# Altium PCB ch559.PcbDoc
Units mil, origin at the board's own origin, x right, y up, seen from the top; angles counter-clockwise.
Board outline 2020 x 2465 mil, 2 copper layers (Top Layer, Bottom Layer); 72 components, 55 nets, 247 pads, 84 vias.
Unrouted connection lines stored in the file: 59.
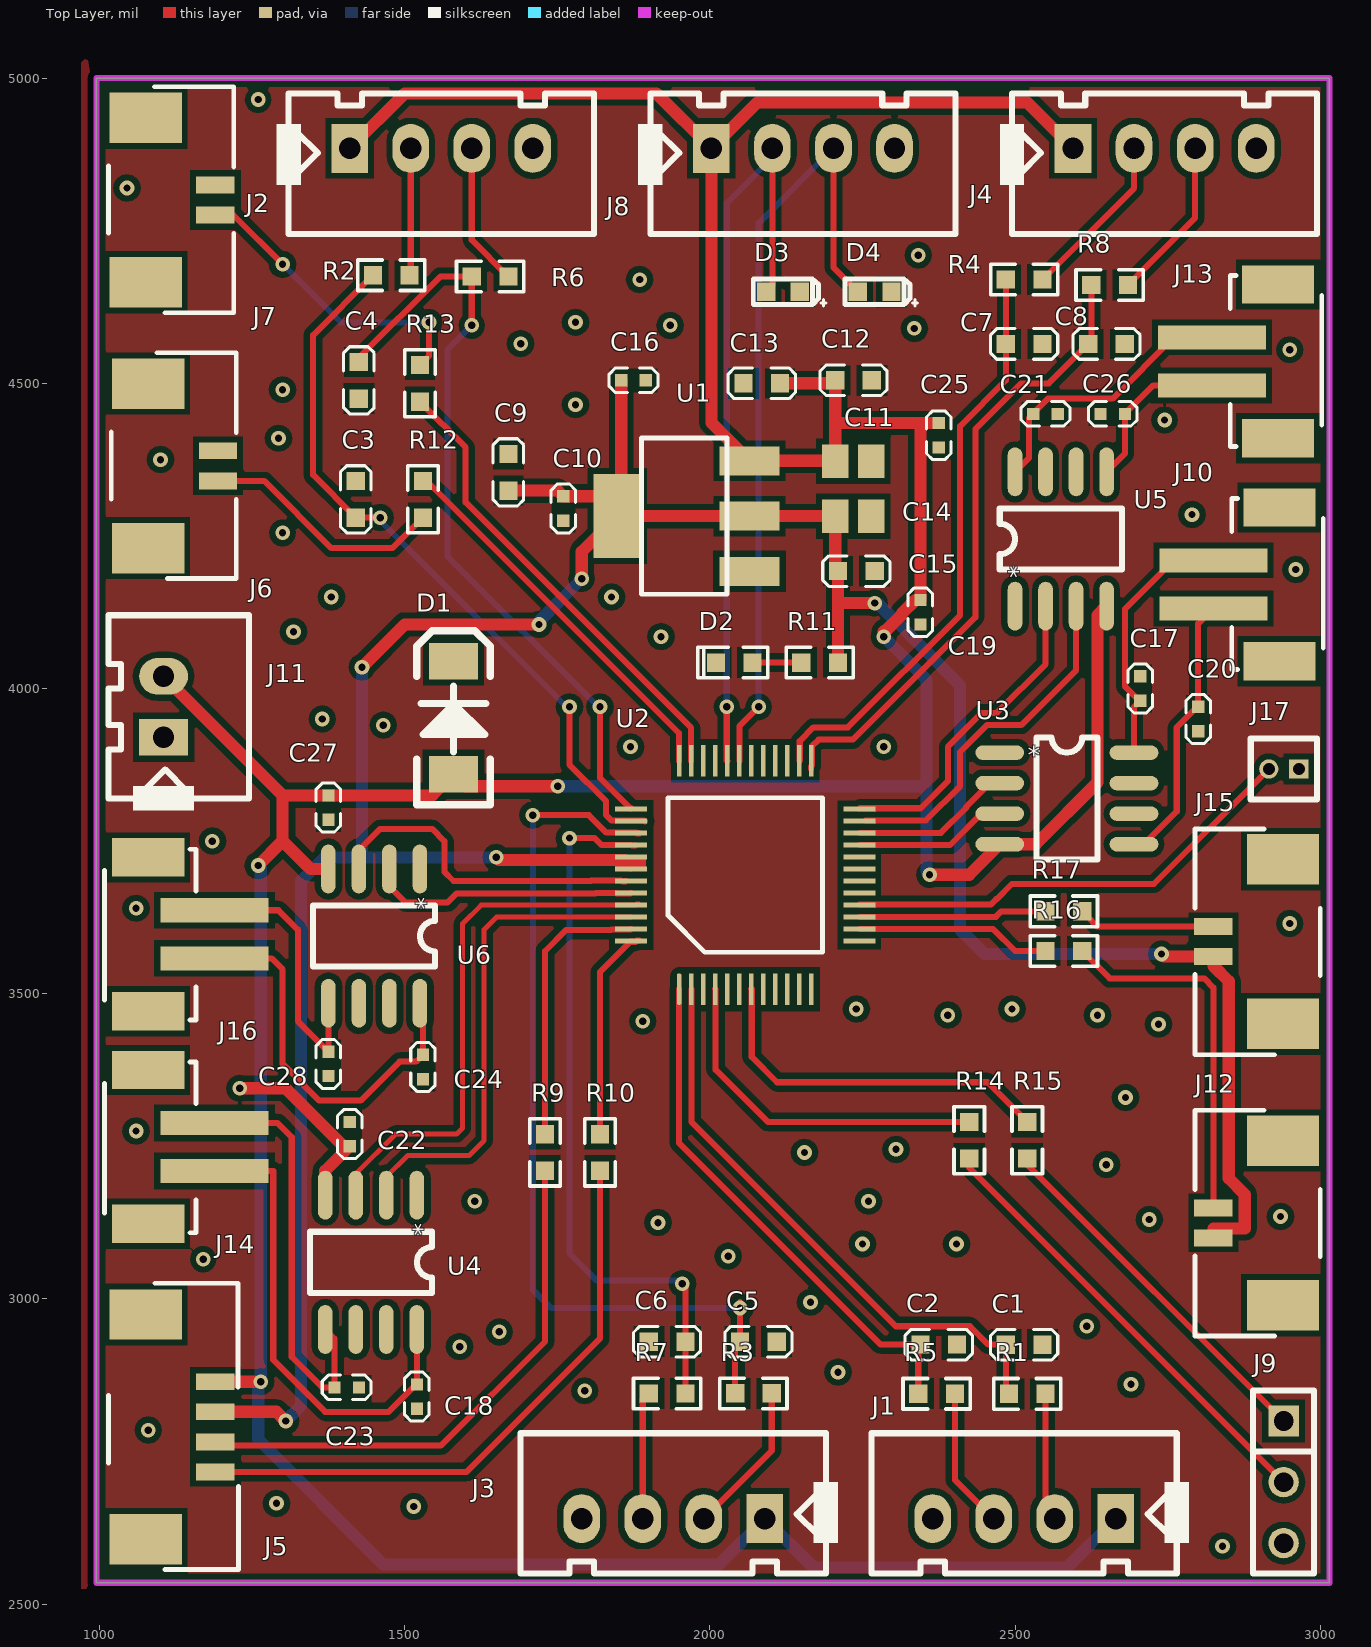
[diagram p0: Top Layer view]
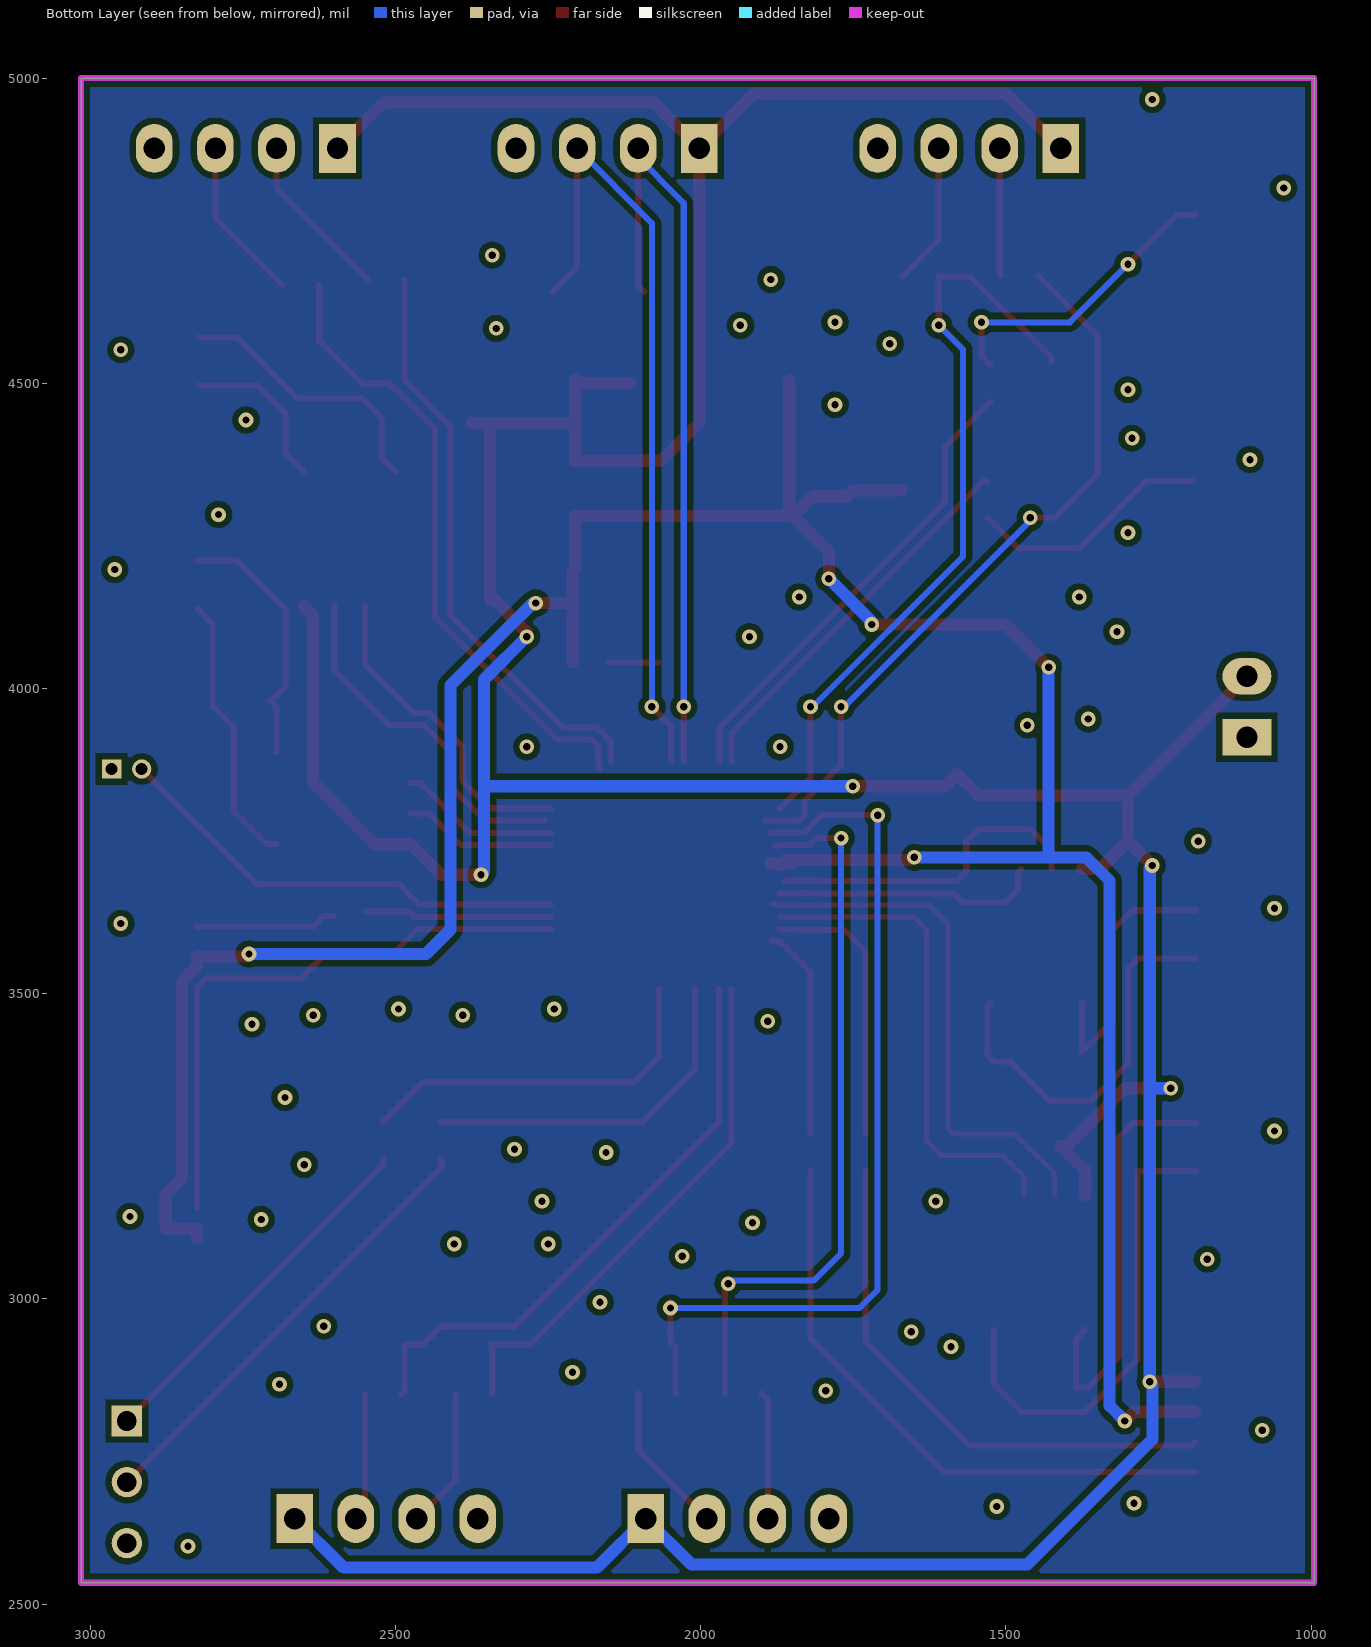
[diagram p1: Bottom Layer view, seen from below]
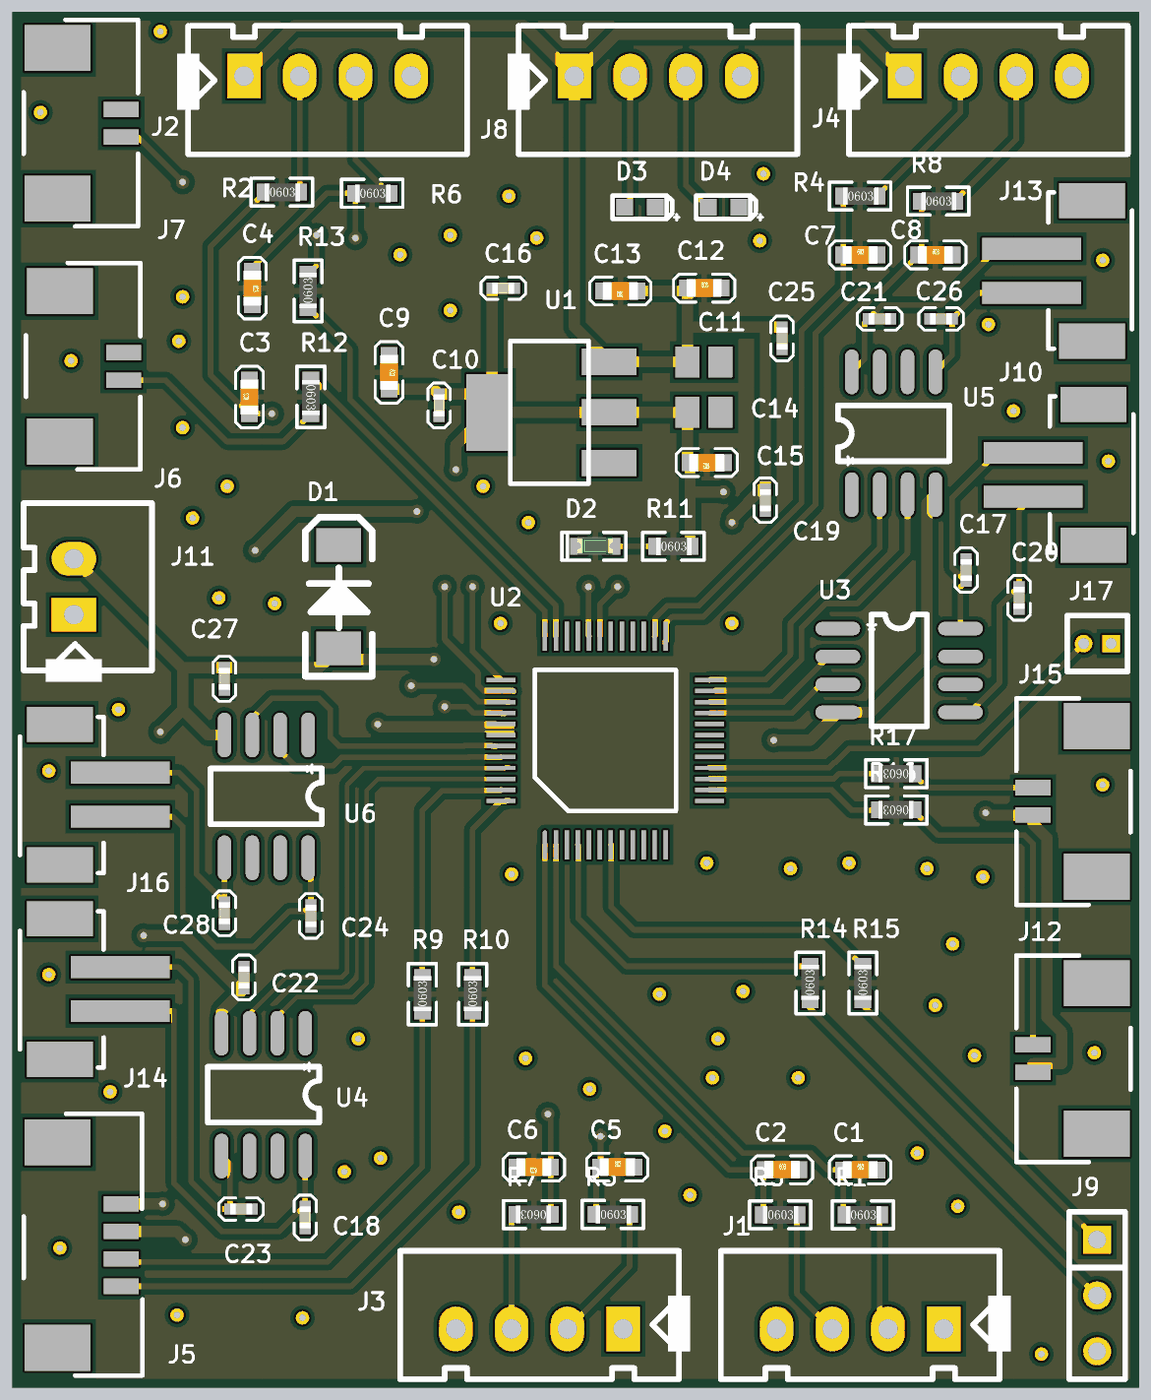
[diagram p2: 3D render of the assembled board from above, using the file's embedded part models]

## Layer stack, top to bottom
Top Solder: solder mask 0.4, Solder Resist, Dk 3.5
Top Layer: signal copper 1.4
Dielectric 1: dielectric 12.6, FR-4, Dk 4.8
Bottom Layer: signal copper 1.4
Bottom Solder: solder mask 0.4, Solder Resist, Dk 3.5

## Board outline
995,2535 995,5000 3015,5000 3015,2535

## Design rules (kind name [scope] priority, off if disabled: settings)
Clearance [All] p1: gap=10 ignorepadtopadclearanceinfootprint=FALSE except(0: Arc-Hole Track-Hole SMDPad-Hole THPad-Hole Via-Hole Fill-Hole Poly-Hole Region-Hole Text-Hole)
PolygonConnect PolygonConnect_1 [IsVia] p1: connectstyle=Direct reliefconductorwidth=10 reliefentries=4 polygonreliefangle="90 Angle" airgapwidth=10
PolygonConnect [All] p2: connectstyle=Relief reliefconductorwidth=10 reliefentries=4 polygonreliefangle="90 Angle" airgapwidth=10
RoutingVias [All] p1: holewidth=28 width=50 viastyle="Through Hole" minholewidth=28 minwidth=50 maxholewidth=28 maxwidth=50
SolderMaskExpansion [All] p1: expansion=4
Width Width_1 [InNetClass('IN')] p1: maxlimit=10 minlimit=8 preferedwidth=8
Width POW [InNetClass('pow')] p2: maxlimit=40 minlimit=10 preferedwidth=20
Width [All] p3: maxlimit=10 minlimit=8 preferedwidth=10
30 further rules are at their usual default settings.

## Classes and differential pairs
net class IN: INA1 INA2 INA3 INA4 INB1 INB2 INB3 INB4
net class pow: 3.3V_VCC 5V_VCC

## Components (designator, comment, footprint, x,y, rotation, side; value= is the part's Value field where it differs from the comment)
C1 "102K10V" C0603 2485,2925 r0 top
C2 "102K10V" C0603 2345,2925.25 r0 top
C3 "102K10V" C0603 1420,4280 r90 top
C4 "102K10V" C0603 1425,4535 r270 top
C5 "102K10V" C0603 2049.5,2930 r0 top
C6 "102K10V" C0603 1960,2930 r180 top
C7 "102K10V" C0603 2485,4564.5 r0 top
C8 "102K10V" C0603 2620,4564.5 r0 top
C9 "106K50V" C0603 1670,4384.21 r270 top
C10 "104J10V" C0402 1760,4275 r90 top
C11 "226M50V" C0805 2235,4372.5 r0 top
C12 "106K50V" C0603 2205.47,4505 r0 top
C13 "105K16V" C0603 2115,4500 r180 top
C14 "226M50V" C0805 2235,4282.5 r0 top
C15 "105K16V" C0603 2270,4192.5 r180 top
C16 "104J10V" C0402 1855,4505 r0 top
C17 "104J10V" C0402 2705,4020 r270 top
C18 "104J10V" C0402 1520,2820 r90 top
C19 "104J10V" C0402 2345,4145 r270 top
C20 "104J10V" C0402 2800,3970 r270 top
C21 "104J10V" C0402 2570,4450 r180 top
C22 "104J10V" C0402 1410,3250 r90 top
C23 "104J10V" C0402 1385,2855 r0 top
C24 "104J10V" C0402 1530,3360 r90 top
C25 "104J10V" C0402 2375,4435 r270 top
C26 "104J10V" C0402 2680,4450 r180 top
C27 "104J10V" C0402 1375,3825 r270 top
C28 "104J10V" C0402 1375,3405 r270 top
D1 "SMAJ5.0CA" DO-214 1580,3859.65 r90 top
D2 "LED0603G" D-LED0603G 2070,4042.5 r180 top
D3 "ESDA_TR1/0603" HS_0603D 2120,4650 r180 top
D4 "ESDA_TR1/0603" HS_0603D 2270,4650 r180 top
J1 "SH1.0-T-1-LT-4A_卧式" XH2.54-4P 2665,2640 r180 top
J2 "SH1.0-T-1-LT-4A_卧式" XH2.54-4P 1410,4885 r0 top
J3 "SH1.0-T-1-LT-4A_卧式" XH2.54-4P 2090,2640 r180 top
J4 "SH1.0-T-1-LT-4A_卧式" XH2.54-4P 2595,4885 r0 top
J5 "Header 4" "J-SH1.27 -4" 1190,2716.57 r90 top
J6 "XH1.27-2P" J-SH1.27-2 1194.17,4340.24 r90 top
J7 "XH1.27-2P" J-SH1.27-2 1190,4775.79 r90 top
J8 "Header 4" XH2.54-4P 2002.5,4885 r0 top
J9 "S2.54-3P" S2.54-3P 2940,2800 r270 top
J10 "SH1.0-T-1-LT-2A_卧式" J-SH2.0-T-1-LT-2A_立式 2825,4131.26 r90 top
J11 "XH1.25-2P" XH2.54-2p 1105,3920 r90 top
J12 "XH1.27-2P" J-SH1.27-2 2825,3149.21 r270 top
J13 "SH1.0-T-1-LT-2A_卧式" J-SH2.0-T-1-LT-2A_立式 2822.52,4496.61 r90 top
J14 "SH1.0-T-1-LT-2A_卧式" J-SH2.0-T-1-LT-2A_立式 1188.27,3288.39 r270 top
J15 "XH1.27-2P" J-SH1.27-2 2825,3610 r270 top
J16 "SH1.0-T-1-LT-2A_卧式" J-SH2.0-T-1-LT-2A_立式 1188.27,3636.77 r270 top
J17 "XH1.25-2P" S1.25-2P 2965,3868.14 r180 top
R1 "100R-1W" R0603 2490,2844.5 r0 top
R2 "100R-1W" R0603 1448,4677 r0 top
R3 "100R-1W" R0603 2041.5,2845.25 r0 top
R4 "100R-1W" R0603 2485,4670 r0 top
R5 "100R-1W" R0603 2341.5,2844.75 r0 top
R6 "100R-1W" R0603 1610,4675 r0 top
R7 "100R-1W" R0603 1960,2845 r180 top
R8 "100R-1W" R0603 2625,4661 r0 top
R9 "1k" R0603 1730,3210 r90 top
R10 "1k" R0603 1820,3210 r90 top
R11 "2K" R0603 2150,4042.5 r0 top
R12 "1k" R0603 1530,4340 r270 top
R13 "1k" R0603 1525,4470 r90 top
R14 "22R" R0603 2425,3230 r90 top
R15 "22R" R0603 2520,3230 r90 top
R16 "1k" R0603 2610,3570 r180 top
R17 "1k" R0603 2610,3635 r180 top
U1 "1117-3.3V" SOT-223 2065,4282.5 r90 top
U2 "CH559L" LQFP48 1949.72,3507.52 r90 top
U3 "PTC918" SO-8 2475,3895 r0 top
U4 "PTC918" SO-8 1520,3170 r270 top
U5 "PTC918" SO-8 2500,4135 r90 top
U6 "PTC918" SO-8 1525,3704.37 r270 top

## Footprints (in the part's own frame and the unit in brackets; to place one, negate y for a bottom-side part, rotate by r counter-clockwise, add the part's x,y. Pads: shape width x height; smd on the part's side, far side on the other; paste and mask are expansions set on the pad)
C0402 [mil]
  rect 20x20 smd: 1(0,0) 2(40,0)
  silkscreen extent -20,-20 60,20, body extent 0,-10 40,10, height 20
C0603 [mil]
  rect 30x30 smd: 1(0,0) 2(60,0)
  silkscreen extent -25,-25 85,25, body extent -1,-15 61,16, height 12
C0805 [mm] "Chip Capacitor, Body 2.0x1.3mm, IPC High Density"
  rect 1.1x1.4 smd: 1(-0.75,0) 2(0.75,0)
  body extent -1.1,-0.72 1.1,0.72, height 1.4
D-LED0603G [mil]
  rect 30x30 smd: 1(0,0) 2(60,0)
  silkscreen extent -25,-25 90,25, body extent -2,-16 62,15, height 24
DO-214 [mil]
  rect 60x80 smd: 1(0,0) 2(185,0)
  silkscreen extent -50,-60 235,60
HS_0603D [mil]
  rect 30x30 smd: 1(-27.5,0) 2(27.5,0)
  silkscreen extent -70,-21 49,23
"J-SH1.27 -4" [mm]
  rect 0.7x1.6 smd: 1(0,0) 2(1.25,0) 3(2.5,0) 4(3.75,0)
  rect 2.1x3 smd: 5(6.55,2.9) 6(-2.8,2.9)
  silkscreen extent -4.06,-0.96 7.85,4.44
J-SH1.27-2 [mm]
  rect 0.7x1.6 smd: 1(0,0) 2(1.25,0)
  rect 2.1x3 smd: 3(4.05,2.9) 4(-2.8,2.9)
  silkscreen extent -4.06,-0.76 5.33,4.44
J-SH2.0-T-1-LT-2A_立式 [mm]
  rect 1x4.5 smd: 1(0,0) 2(2,0)
  rect 1.6x3 smd: 3(-2.2,-2.75) 4(4.2,-2.75)
  silkscreen extent -2.54,-4.57 4.57,-0.76
LQFP48 [mm]
  oval 1.321x0.2 smd: 1(0,0)
  rect 1.321x0.2 smd: 2(0,-0.5) 3(0,-1) 4(0,-1.5) 5(0,-2) 6(0,-2.5) 7(0,-3) 8(0,-3.5) 9(0,-4) 10(0,-4.5) 11(0,-5) 12(0,-5.5) 25(9.5,-5.5) 26(9.5,-5) 27(9.5,-4.5) 28(9.5,-4) 29(9.5,-3.5) 30(9.5,-3) 31(9.5,-2.5) 32(9.5,-2) 33(9.5,-1.5) 34(9.5,-1) 35(9.5,-0.5) 36(9.5,0)
  rect 0.2x1.321 smd: 13(2,-7.5) 14(2.5,-7.5) 15(3,-7.5) 16(3.5,-7.5) 17(4,-7.5) 18(4.5,-7.5) 19(5,-7.5) 20(5.5,-7.5) 21(6,-7.5) 22(6.5,-7.5) 23(7,-7.5) 24(7.5,-7.5) 37(7.5,2) 38(7,2) 39(6.5,2) 40(6,2) 41(5.5,2) 42(5,2) 43(4.5,2) 44(4,2) 45(3.5,2) 46(3,2) 47(2.5,2) 48(2,2)
  silkscreen extent 1.54,-5.96 7.96,0.47
R0603 [mil]
  rect 30x30 smd: 1(0,0) 2(60,0)
  silkscreen extent -25,-25 85,25, body extent 0,-16 62,15, height 18
S1.25-2P [mm]
  rect 0.8x0.8 hole 0.5: 1(0,0)
  round 0.8 hole 0.5: 2(1.25,0)
  silkscreen extent -0.75,-1.27 2,1.27, body extent -0.41,-0.41 0.39,0.39, height 8
S2.54-3P [mil] "P-SIP5"
  rect 50x50 hole 32: 1(0,0)
  round 50 hole 32: 2(100,0) 3(200,0)
  silkscreen extent -50,-50 250,50, body extent -50,-50 250,50, height 315
SO-8 [mil]
  oval 80x24 smd: 1(0,0) 2(0,-50) 3(0,-100) 4(0,-150) 5(220,-150) 6(220,-100) 7(220,-50) 8(220,0)
  silkscreen extent 60,-175 160,25
SOT-223 [mm]
  rect 1.2x2.5 smd: 1(-2.3,0) 2(0,0) 3(2.3,0)
  rect 3.5x2 smd: 2(0,5.5)
  silkscreen extent -3.25,0.94 3.25,4.5
XH2.54-2p [mil]
  rect 60x80 hole 35: 1(0,0)
  oval 60x80 hole 35: 2(100,0)
  silkscreen extent -120,-140 200,90, body extent -100,-140 200,90, height 256
XH2.54-4P [mil]
  rect 60x80 hole 35: 1(0,0)
  oval 60x80 hole 35: 2(100,0) 3(200,0) 4(300,0)
  silkscreen extent -120,-140 400,90, body extent -100,-140 400,90, height 256

## Part data
C1 C2 C3 C4 C5 C6 C7 C8: library part C0603X7R-102K10V, "贴片电容-陶瓷"
C9 C12: library part C0603X7R-106K50V, "贴片电容-陶瓷", ="无编码 有封装", 生产商="风华 三星", 规格型号=10uF±10%_50V_X7R_C0603
C10 C16 C17 C18 C19 C20 C21 C22 C23 C24 C25 C26 C27 C28: library part C0402X7R-104J10V, "贴片电容-陶瓷", ="无编码 有封装", 生产商="风华 三星", 规格型号=100nF±5%_10V_X7R_C0402
C11 C14: library part C0805Y5V-226M50V, "贴片电容-陶瓷", =无封装无编码, 生产商="风华 三星", 规格型号=22uF±20%_50V_Y5V_C0805
C13 C15: library part C0603X7R-105K16V, "贴片电容-陶瓷", ="无编码 有封装", 生产商="风华 三星", 规格型号=1uF±10%_16V_X7R_C0603
D2: library part DLED-0603-G, "贴片二极管-LED", 规格型号=0603-GREEN, 货品编码=无样品无编码
D3 D4: library part "D Zener", "Zener Diode"
J5 J8: "Header, 4-Pin", LatestRevisionDate=17-Jul-2002, LatestRevisionNote="Re-released for DXP Platform.", Publisher="Altium Limited"
J6 J7 J12 J15: library part J-XH1.27-2P, "接插件-1.27", 规格型号=XH2.54-2P, 货品编码=371007
J9: library part J-S2.54-3P, "单排排针-直针", 规格型号=S2.54-3P, 货品编码=372015
J11: library part J-XH2.54-2P_1, "接插件-2.54", 规格型号=XH2.54-2P, 货品编码=371007
J17: library part J-XH2.54-2P, "接插件-2.54", 规格型号=XH2.54-2P, 货品编码=371007
R1 R2 R3 R4 R5 R6 R7 R8: library part R1-100R, "插件电阻-碳膜", 生产商="厚声 国巨", 规格型号=100R±5%_1W_±100ppm_AXIAL0.6, 货品编码=312145
R9 R10 R11 R12 R13 R14 R15 R16 R17: library part R0603-100RF, "贴片电阻-通用", 生产商="厚声 国巨", 规格型号=100R±1%_1/10W_±200ppm_R0603
U1: library part "AP1117-33 SOT-223", "芯片 电源类", 单价=0.15
U2: "单片机"
U3 U4 U5 U6: "马达驱动芯片"
D1: PCB DECAL=DO-214

## Via types
v1: diameter 24, hole 12, Top Layer to Bottom Layer, 59 vias
v2: diameter 24, hole 12, Top Layer to Bottom Layer, tented both sides, 25 vias

## Nets (pads, with @x,y where several pads share a name; then routed paths per layer and width w, separated by ;. In a path a pad name is that pad's centre, name@x,y a point inside that pad or via, vN(x,y) a via of type N, cw(c..) or ccw(c..) an arc to the next point about the centre after c; other vN are vias at no path point)
3.3V_VCC: C9.2 C10.2 C14.1 C15.2 C16.1 J5.3 J12.2 J15.2 R11.2 U1.2 U2.41 U2.42 | length 5084.2
  Top Layer w20: J5.3 1290,2815 v2(1305,2800) ; v2(1430,4035) 1500,4105 v2(1720,4105) ; v2(1650,3723.39) 1654.53,3718.86 1861.14,3718.86 1870,3710 ; C9.2 1750.79,4324.21 C10.2 1815.96,4315 U1.2@1848.46,4282.5 ; v2(1790,4180) 1790,4224.03 U1.2@1848.46,4282.5 ; C16.1 1855,4289.03 U1.2@1848.46,4282.5 ; R11.2 2210,4140 ; v2(2270,4140) 2210,4140 ; v2(2740,3565) 2744.21,3560.79 J15.2 2825,3545.36 2850,3520.36 2850,3197.77 2876.5,3171.28 2876.5,3115.43 2825,3115.43 J12.2 ; U1.2@1848.46,4282.5 2065,4282.5 C14.1 2205.47,4197.02 C15.2 2210,4140
  Bottom Layer w20: v2(1305,2800) 1330,2825 1330,3685 1368.39,3723.39 1425,3723.39 ; v2(1430,4035) 1430,3728.39 1425,3723.39 ; v2(1650,3723.39) 1425,3723.39 ; v2(1720,4105) 1720,4110 v2(1790,4180) ; v2(2270,4140) 2274.75,4140 2297.75,4117 2298.25,4117 2410,4005.25 2410,3605 2450,3565 v2(2740,3565)
5V_VCC: C11.1 C12.1 C13.1 C19.1 C22.1 C25.1 C27.1 D1.1 J1.1 J2.1 J3.1 J4.1 J5.4 J8.1 J11.2 U1.3 U3.4 U4.4 U5.4 U6.4 | length 8365.6
  Top Layer w20: J11.2 1300,3825 ; J5.4 v2(1264.21,2864.21) ; v2(1230,3345) 1304.64,3345 1399.64,3250 C22.1 1370,3210 U4.4 ; v2(1260,3710) 1300,3750 ; U6.4 1345.63,3704.37 1300,3750 ; J2.1 1500,4975 1912.5,4975 J8.1 ; v2(1750.79,3840) 1599.65,3840 D1.1 1545.35,3825 C27.1 1300,3825 ; C13.1 2200.47,4500 C12.1 2205.47,4435.55 ; v2(2285,4085) 2285,4093.28 2286.72,4095 2288.64,4095 2315,4121.36 2315,4123.28 2336.72,4145 C19.1 2345,4435 ; v2(2360,3695) 2425,3695 U3.4 2534.11,3745 2635,3845.89 2635,4120 U5.4 ; C25.1 2345,4435 ; J4.1 2520,4960 2077.5,4960 J8.1 ; 1300,3750 1300,3825 ; J8.1 2002.5,4435.55 U1.3 2204.92,4373.05 C11.1 2205.47,4435.55 ; 2205.47,4435.55 2206.02,4435 2345,4435
  Bottom Layer w20: v2(1230,3345) 1264.21,3345 ; v2(1260,3710) 1264.21,3705.79 1264.21,3345 ; v2(1750.79,3840) 2350,3840 2355,3835 ; v2(2285,4085) 2355,4015 2355,3835 ; v2(2360,3695) 2355,3700 2355,3835 ; J1.1 2585,2560 2170,2560 J3.1 2015,2565 1465,2565 1260,2770 1260,2860 v2(1264.21,2864.21) 1264.21,3345
DM: D3.2 J8.2 U2.32 | length 1280.1
  Top Layer w10: v2(2027.72,3970) 2027.72,3882.28 U2.32 ; D3.2 2102.5,4660 J8.2
  Bottom Layer w10: v2(2027.72,3970) 2027.72,4795.22 2110,4877.5 J8.2
DP: D4.2 J8.3 U2.31 | length 1318.8
  Top Layer w10: U2.31@2048.47,3881.53 2048.47,3938.47 v2(2080,3970) ; J8.3 2202.5,4690 D4.2
  Bottom Layer w10: v2(2080,3970) 2080,4762.5 J8.3
GND: C1.2 C2.2 C3.2 C4.2 C5.2 C6.2 C7.2 C8.2 C9.1 C10.1 C11.2 C12.2 C13.2 C14.2 C15.1 C16.2 C17.1 C18.1 C19.2 C20.2 C21.1 C22.2 C23.2 C24.1 C25.2 C26.2 C27.2 C28.2 D1.2 D2.2 D3.1 D4.1 J1.4 J2.4 J3.4 J4.4 J6.2 J7.2 J8.4 J9.3 J10.3 J10.4 J11.1 J13.3 J13.4 J14.3 J14.4 J16.3 J16.4 J17.1 U1.1 U2.18 U3.6 U3.7 U4.6 U4.7 U5.6 U5.7 U6.6 U6.7
  other v1: 2840,2595 1515,2660 1290,2665 1080,2785 1795,2849.5 2690,2860 2210,2880 1590,2921.75 1655,2946 2617.5,2955.25 2165,2994.5 1170,3065 2030,3070 2250,3090 2403.99,3090 1915,3125 2720,3130 2935,3135 1615,3160 2260,3160 2649.63,3220 2155,3240 2305,3245 1060,3275 2681,3330 2735,3450 1890,3455 2390,3465 2635,3465 2240,3475 2495,3475 2950,3615 1060,3640 1185,3750 1869.92,3904.47 2285,3904.47 1465,3940 1365,3950 1920,4085 1317.97,4093.28 1380,4150 1838.77,4150 2960,4195 1300,4255 2790,4285 1100,4375 1293.23,4410 2745,4440 1780,4465 1300,4489.5 2950,4555 1690,4565 2335,4590 1935,4595 1780,4600 1885,4670 2341.5,4710 1045,4820 1260,4965
INA1: U2.46 U4.2 | length 809.7
  Top Layer w8: U4.2 1470,3200 1505,3235 1605.55,3235 1630,3259.45 1630,3605 1650.63,3625.63 U2.46
INA2: U2.44 U6.2 | length 442.7
  Top Layer w10: U6.2 1480,3699.37 1480,3670.95 1501.58,3649.37 1570.12,3649.37 1585,3664.25 1812.97,3664.25 1813.92,3665.2 1846.02,3665.2 1846.96,3664.25 1870.24,3664.25 U2.44
INA3: U2.22 U3.2 | length 264.5
  Top Layer w10: U2.22 2378.43,3763.43 2420,3805 2420,3806.18 2458.82,3845 U3.2
INA4: U2.24 U5.2 | length 531.2
  Top Layer w10: U2.24 2246.06,3803.86 2345.57,3803.86 2390,3848.28 2390,3904.47 2445.53,3960 2470,3960 2550,4040 U5.2
INB1: U2.45 U4.3 | length 878
  Top Layer w8: U4.3 1420,3205 1485,3270 1585,3270 1595,3280 1595,3615 1625.25,3645.25 1878.11,3645.25 1879.92,3647.06 U2.45@1883.67,3647.06
INB2: U2.43 U6.3 | length 553.5
  Top Layer w10: U6.3 1425,3735 1460,3770 1545,3770 1565,3750 1565,3699.68 1580,3684.68 1805.12,3684.68 1805.63,3685.2 1854.3,3685.2 1854.81,3684.68 1862.39,3684.68 1861.95,3684.25 U2.43@1856.84,3684.25
INB3: U2.21 U3.3 | length 251.4
  Top Layer w10: U2.21@2245,3743.43 2393.43,3743.43 2445,3795 U3.3
INB4: U2.23 U5.3 | length 584.9
  Top Layer w10: U2.23@2255,3783.86 2353.86,3783.86 2410,3840 2410,3896.18 2453.82,3940 2510,3940 2600,4030 U5.3
NetD2_1: D2.1 R11.1 | length 80
  Top Layer w10: D2.1 R11.1
NetJ1_2: J1.2 R1.2 | length 210.7
  Top Layer w10: R1.2 2550,2655 J1.2
NetJ1_3: J1.3 R5.2 | length 231.1
  Top Layer w10: R5.2 2401.5,2703.5 J1.3
NetJ2_2: J2.2 R2.2 | length 208.8
  Top Layer w10: R2.2 1510,4679 J2.2
NetJ2_3: J2.3 R6.2 | length 234.9
  Top Layer w10: J2.3 1610,4735 R6.2
NetJ3_2: J3.2 R3.2 | length 251.4
  Top Layer w10: J3.2 2101.5,2751.5 R3.2
NetJ3_3: J3.3 R7.2 | length 209.1
  Top Layer w10: J3.3 1890,2835 R7.2
NetJ4_2: J4.2 R4.2 | length 277.1
  Top Layer w10: R4.2 2695,4820 J4.2
NetJ4_3: J4.3 R8.2 | length 269.6
  Top Layer w10: R8.2 2795,4771 J4.3
NetJ5_1: J5.1 R10.1 | length 995.5
  Top Layer w10: J5.1 1601.57,2716.57 1820,2935 R10.1
NetJ5_2: J5.2 R9.1 | length 892.7
  Top Layer w10: J5.2 1195.79,2760 1559.74,2760 1730,2930.26 R9.1
NetJ6_1: J6.1 R12.2 | length 402.2
  Top Layer w10: J6.1 1269.76,4340.24 1380,4230 1480,4230 R12.2
NetJ7_1: J7.1 R13.2 | length 499
  Top Layer w10: J7.1 1219.21,4775.79 v2(1300,4695) ; R13.2 1540,4545 v2(1540,4600)
  Bottom Layer w10: v2(1300,4695) 1395,4600 v2(1540,4600)
NetJ9_1: J9.1 R15.1 | length 604
  Top Layer w10: R15.1 2520,3220 J9.1
NetJ9_2: J9.2 R14.1 | length 743.3
  Top Layer w10: R14.1 2425,3215 J9.2
NetJ12_1: J12.1 R16.1 | length 600.6
  Top Layer w10: R16.1 2655,3525 2810,3525 2825,3510 J12.1
NetJ15_1: J15.1 R17.1 | length 229.7
  Top Layer w10: R17.1@2602.5,3627.5 2617.5,3627.5 2635,3610 J15.1
NetJ17_2: J17.2 U2.16 | length 762.8
  Top Layer w10: U2.16@2245,3645.95 2460.16,3645.95 2469.22,3655 2470,3655 2495,3680 2727.65,3680 J17.2
NetR9_2: R9.2 U2.47 | length 455.9
  Top Layer w10: R9.2 1730,3570 1764.25,3604.25 1837.83,3604.25 1838.77,3605.2 1870.24,3605.2 U2.47
NetR10_2: R10.2 U2.48 | length 351.1
  Top Layer w10: R10.2 1820,3535.28 1869.92,3585.2 1878.52,3585.2 1880.33,3587.01 U2.48@1884.38,3587.01
NetR12_1: R12.1 U2.36 | length 636
  Top Layer w10: R12.1 1536.57,4340 1949.41,3927.16 U2.36@1949.41,3881.53
NetR13_1: R13.1 U2.35 | length 772.5
  Top Layer w10: R13.1 1600,4395 1600,4305 1969.41,3935.59 U2.35
NetR14_2: R14.2 U2.4 | length 583.2
  Top Layer w10: U2.4 2009.53,3506.77 2009.53,3375.47 2095,3290 R14.2
NetR15_2: R15.2 U2.7 | length 607.3
  Top Layer w10: U2.7 2068.58,3507.52 2068.58,3396.42 2110,3355 2455,3355 R15.2
NetR16_2: R16.2 U2.14 | length 319.9
  Top Layer w10: U2.14 2464.05,3605.95 2500,3570 R16.2
NetR17_2: R17.2 U2.15 | length 308.8
  Top Layer w10: U2.15@2245,3625.95 2468.45,3625.95 2477.5,3635 R17.2
OUTA1: C18.2 J14.2 U4.8 | length 785
  Top Layer w10: J14.2 1284.65,3209.65 1284.65,2900.35 1369.99,2815 1473.79,2815 1518.79,2860 C18.2 U4.8
OUTA2: C24.2 J16.2 U6.8 | length 646.6
  Top Layer w10: J16.2 1281.97,3558.03 1300,3540 1300,3385 1360,3325 1427.93,3325 1491.72,3388.79 1518.79,3388.79 C24.2 1530,3479.37 U6.8
OUTA3: C17.2 J10.2 U3.8 | length 428.3
  Top Layer w10: U3.8 2695,3970 C17.2 2703.79,3980 2680,4003.79 2680,4130 2760,4210 J10.2
OUTA4: C21.2 J13.2 U5.8 | length 452.6
  Top Layer w10: U5.8 2523,4378 2523,4443 C21.2 2530,4451.21 2553.79,4475 2660,4475 2760.35,4575.35 J13.2
OUTB1: C23.1 J14.1 U4.5 | length 688.3
  Top Layer w10: J14.1 1291.61,3288.39 1315,3265 1315,2905 1365,2855 C23.1 1385,2935 U4.5
OUTB2: C28.1 J16.1 U6.5 | length 450
  Top Layer w10: J16.1 1293.23,3636.77 1325,3605 1325,3455 C28.1 U6.5
OUTB3: C20.1 J10.1 U3.5 | length 450.3
  Top Layer w10: U3.5 2711.18,3745 2765,3798.82 2765,3936.21 2798.79,3970 C20.1 2800,4106.26 J10.1
OUTB4: C26.1 J13.1 U5.5 | length 269.3
  Top Layer w10: U5.5 2680,4385 C26.1 2726.61,4496.61 J13.1
P00: C6.1 R7.1 U2.40 | length 1180.6
  Top Layer w10: v2(1770,3755) 1811.06,3755 1822.2,3743.86 1871.5,3743.86 1872.36,3742.99 U2.40@1877.87,3742.99 ; v2(1955,3025) 1960,3020 C6.1 R7.1
  Bottom Layer w10: v2(1770,3755) 1770,3075 1815,3030 1950,3030 v2(1955,3025)
P01: C5.1 R3.1 U2.39 | length 1469.4
  Top Layer w10: v2(1710,3792.64) 1801.7,3792.64 1830.49,3763.86 1879.78,3763.86 1880.65,3762.99 U2.39@1885.01,3762.99 ; R3.1 2041.5,2922 C5.1 v2(2049.5,2985) v2@2049.5,2994.5
  Bottom Layer w10: v2(1710,3792.64) 1710,3015 1740,2985 v2(2049.5,2985)
P02: C3.1 R2.1 U2.38 | length 1218
  Top Layer w10: R2.1 1350,4579 1350,4350 C3.1 v2(1460,4280) ; v2(1770,3970) 1770,3875.5 1829.98,3815.51 1829.98,3792.64 1838.77,3783.86 1892.43,3783.86 U2.38@1893.77,3782.52
  Bottom Layer w10: v2(1460,4280) 1460,4275.15 1765.15,3970 v2(1770,3970)
P03: C4.1 R6.1 U2.37 | length 1261.6
  Top Layer w10: C4.1 1425,4541.57 1558.43,4675 R6.1 v2(1610,4595) ; v2(1820,3970) 1820,3853.78 1869.92,3803.86 U2.37@1870.98,3803.86
  Bottom Layer w10: v2(1610,4595) 1570.12,4555.12 1570.12,4216.7 1816.82,3970 v2(1820,3970)
P16: C2.1 R5.1 U2.1 | length 866.2
  Top Layer w10: U2.1 1949.72,3255.28 2279.75,2925.25 C2.1 2341.5,2921.75 R5.1
P17: C1.1 R1.1 U2.2 | length 966.4
  Top Layer w10: U2.2@1969.72,3507.52 1969.72,3290.28 2304.75,2955.25 2426.21,2955.25 2456.47,2925 C1.1 2485,2849.5 R1.1
P24: C8.1 R8.1 U2.25 | length 1042.9
  Top Layer w10: U2.25@2165.51,3868.14 2165.51,3872.19 2167.32,3874 2167.32,3905.46 2178.07,3916.21 2234.5,3916.21 2435,4116.72 2435,4425 2510,4500 2555.5,4500 C8.1 2625,4569.5 R8.1
P25: C7.1 R4.1 U2.26 | length 961.7
  Top Layer w10: U2.26 2147.32,3882.28 2147.32,3913.75 2169.79,3936.21 2226.21,3936.21 2410,4120 2410,4430 2485,4505 C7.1 R4.1
pads on no net: J5.5 J5.6 J6.3 J6.4 J7.3 J7.4 J12.3 J12.4 J15.3 J15.4 U2.3 U2.5 U2.6 U2.8 U2.9 U2.10 U2.11 U2.12 U2.13 U2.17 U2.19 U2.20 U2.27 U2.28 U2.29 U2.30 U2.33 U2.34 U3.1 U4.1 U5.1 U6.1

## Polygon pours and split planes (outlines as drawn)
GND on Top Layer "Top Layer-No Net" (solid, pour order 2): 795,4780
GND on Top Layer "Top Layer-No Net 1" (solid, remove dead copper, pour order 0): 985,5005 995,5015 3025,5015 3025,2520 3020,2525 970,2525 970,5025 980,5035
GND on Bottom Layer "Bottom Layer-No Net" (solid, remove dead copper, pour order 6): 840,4825
GND on Bottom Layer "Bottom Layer-No Net 1" (solid, remove dead copper, pour order 4): 995,5000 3015,5000 3015,2550 3010,2545 995,2545

## Keep-outs
Keep-Out Layer:
  the board outline again, w10

## Other copper
Top Layer:
  rectangle net 3.3V_VCC: 1845,3704.37 1895,3723.39

## Silkscreen, mask and mechanical layers (free items; w line width, h text height)
Mechanical 1:
  text "rx" at 2870,2670 h40 r90

## Dimensions
3015,5175 to 995,5220 on Mechanical 1
825,5010 to 650,2555 on Mechanical 1

## Text inside footprints (layer, text, board x,y; h text height)
U3: Top Overlay "*" at 2521,3876 h30
U4: Top Overlay "*" at 1501,3124 h30 r270
U5: Top Overlay "*" at 2519,4181 h30 r90
U6: Top Overlay "*" at 1506,3658.37 h30 r270